# Altium PCB bmb_extender.PcbDoc
Units mil, origin at the board's own origin, x right, y up, seen from the top; angles counter-clockwise.
Board outline 2450 x 12000 mil, 2 copper layers (Top Layer, Bottom Layer); 2 components, 10 nets, 36 pads, 4 vias.
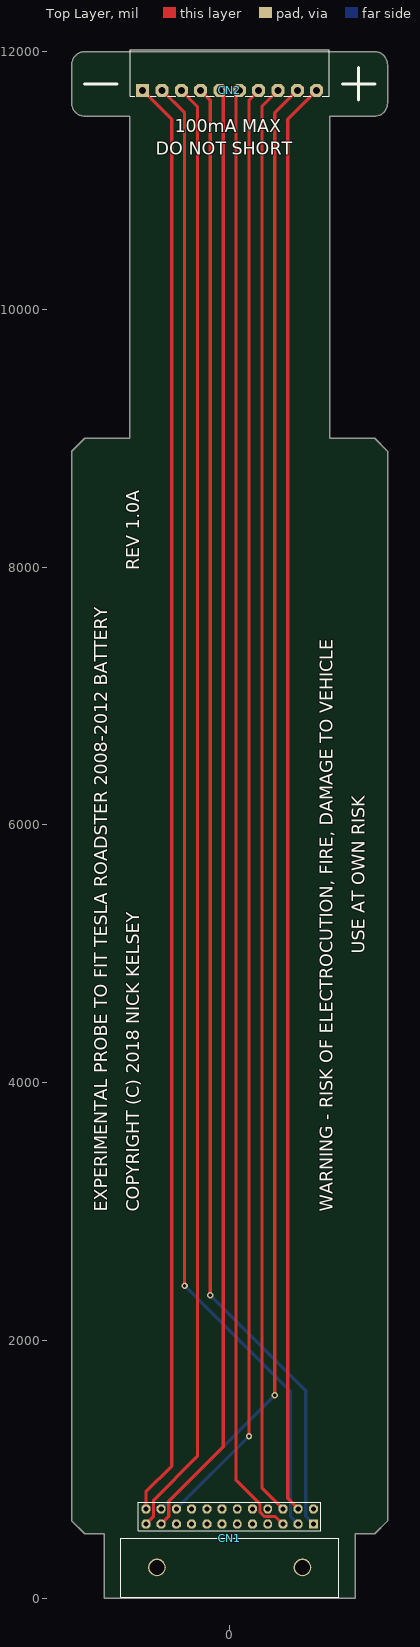
[diagram p0: Top Layer view]
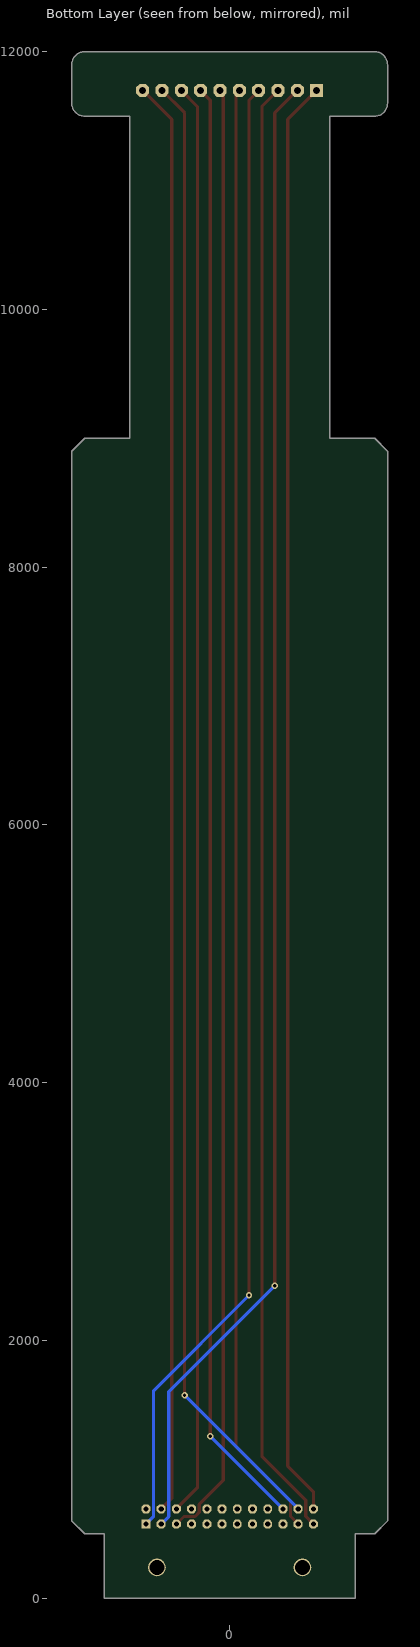
[diagram p1: Bottom Layer view, seen from below]

## Layer stack, top to bottom
Top Solder: solder mask 0.4, Solder Resist, Dk 3.5
Top Layer: signal copper 1.4
Dielectric 1: dielectric 12.6, FR-4, Dk 4.8
Bottom Layer: signal copper 1.4
Bottom Solder: solder mask 0.4, Solder Resist, Dk 3.5

## Board outline
-1225,600 -1125,500 -975,500 -975,0 975,0 975,500 1125,500 1225,600 1225,8900 1125,9000 775,9000 775,11500 1125,11500 ccw(c1125,11600) 1225,11600 1225,11900 ccw(c1125,11900) 1125,12000 -1125,12000 ccw(c-1125,11900) -1225,11900 -1225,11600 ccw(c-1125,11600) -1125,11500 -775,11500 -775,9000 -1125,9000 -1225,8900

## Design rules (kind name [scope] priority, off if disabled: settings)
Clearance [All] p1: gap=10 ignorepadtopadclearanceinfootprint=FALSE except(0: Arc-Hole Track-Hole SMDPad-Hole THPad-Hole Via-Hole Fill-Hole Poly-Hole Region-Hole Text-Hole)
HoleSize [All] p1: absolutevalues=TRUE maxlimit=500 minlimit=1 maxpercent=80.000 minpercent=20.000
PolygonConnect [All] p1: connectstyle=Relief reliefconductorwidth=10 reliefentries=4 polygonreliefangle="90 Angle" airgapwidth=10
RoutingVias [All] p1: holewidth=28 width=50 viastyle="Through Hole" minholewidth=28 minwidth=50 maxholewidth=28 maxwidth=50
SilkToSilkClearance [All] p1 off: silktosilkclearance=10
SilkToSolderMaskClearance [IsPad] p1: minsilkscreentomaskgap=0 clearancetoexposedcopper=TRUE
SolderMaskExpansion [All] p1: expansion=4
Width [All] p1: maxlimit=100 minlimit=5 preferedwidth=10
27 further rules are at their usual default settings.

## Components (designator, comment, footprint, x,y, rotation, side; value= is the part's Value field where it differs from the comment)
CN1 "0444282401" MOLEX_0444282401 0,575 r180 top
CN2 "20020110-D101A01LF" 20020110-D101A01LF 0,11700 r0 top

## Footprints (in the part's own frame and the unit in brackets; to place one, negate y for a bottom-side part, rotate by r counter-clockwise, add the part's x,y. Pads: shape width x height; smd on the part's side, far side on the other; paste and mask are expansions set on the pad)
20020110-D101A01LF [mm]
  rect 2.54x2.54 hole 1.4: 1(-17.145,0)
  oct 2.54x2.54 hole 1.4: 2(-13.335,0) 3(-9.525,0) 4(-5.715,0) 5(-1.905,0) 6(1.905,0) 7(5.715,0) 8(9.525,0) 9(13.335,0) 10(17.145,0)
  silkscreen extent -19.63,-1.2 19.63,8
MOLEX_0444282401 [mm]
  round 3.5 hole 3: 0(-14.34,8.53) 0(14.34,8.53)
  rect 1.75x1.75 hole 1.02: 1(-16.5,0)
  oct 1.75x1.75 hole 1.02: 2(-13.5,0) 3(-10.5,0) 4(-7.5,0) 5(-4.5,0) 6(-1.5,0) 7(1.5,0) 8(4.5,0) 9(7.5,0) 10(10.5,0) 11(13.5,0) 12(16.5,0) 13(-16.5,-3) 14(-13.5,-3) 15(-10.5,-3) 16(-7.5,-3) 17(-4.5,-3) 18(-1.5,-3) 19(1.5,-3) 20(4.5,-3) 21(7.5,-3) 22(10.5,-3) 23(13.5,-3) 24(16.5,-3)
  silkscreen extent -21.5,-4.3 21.5,14.43

## Part data
CN2: library part SIL10

## Via types
v1: diameter 50, hole 25, Top Layer to Bottom Layer, tented both sides, 4 vias

## Nets (pads, with @x,y where several pads share a name; then routed paths per layer and width w, separated by ;. In a path a pad name is that pad's centre, name@x,y a point inside that pad or via, vN(x,y) a via of type N, cw(c..) or ccw(c..) an arc to the next point about the centre after c; other vN are vias at no path point)
V0: CN1.24 CN2.1 | length 11182.8
  Top Layer w25: CN2.1 -450,11475 -450,1025 -649.61,825.39 CN1.24
V1: CN1.2 CN2.2 | length 11562.6
  Top Layer w25: CN2.2 -350,11525 v1(-350,2425)
  Bottom Layer w25: v1(-350,2425) 473,1602 473,633.5 CN1.2
V2: CN1.12 CN2.3 | length 11342.3
  Top Layer w25: CN1.12 -590,634.61 -590,760 -250,1100 -250,11575 CN2.3
V3: CN1.1 CN2.4 | length 11487.3
  Top Layer w25: CN2.4 -150,11625 v1(-150,2350)
  Bottom Layer w25: v1(-150,2350) 590,1610 590,634.61 CN1.1
V4: CN1.11 CN2.5 | length 11334.8
  Top Layer w25: CN1.11 -472,634.5 -472,752.61 -50,1174.61 -50,11675 CN2.5
V5: CN1.3 CN2.6 | length 11336.5
  Top Layer w25: CN2.6 50,11675 50,914 236,728 236,666 268,634 354.39,634 CN1.3
V6: CN1.22 CN2.7 | length 11271.3
  Top Layer w25: v1(150,1256.5) 150,11625 CN2.7
  Bottom Layer w25: CN1.22 v1(150,1256.5)
V7: CN1.15 CN2.8 | length 11126.3
  Top Layer w25: CN2.8 250,11575 250,856.5 CN1.15
V8: CN1.23 CN2.9 | length 11444.9
  Top Layer w25: v1(350.2,1574.8) 350.2,11525 ; 350.2,11524.8 350,11525 CN2.9
  Bottom Layer w25: CN1.23 v1(350.2,1574.8)
V9: CN1.14 CN2.10 | length 11133.8
  Top Layer w25: CN1.14 450,774.61 450,11475 CN2.10
pads on no net: CN1.0 CN1.4 CN1.5 CN1.6 CN1.7 CN1.8 CN1.9 CN1.10 CN1.13 CN1.16 CN1.17 CN1.18 CN1.19 CN1.20 CN1.21

## Silkscreen, mask and mechanical layers (free items; w line width, h text height)
Top Overlay:
  lines w25: -1125,11750 -875,11750 ; 875,11750 1125,11750 ; 1000,11625 1000,11875
  text "100mA MAX" at -425,11375 h100
  text "DO NOT SHORT" at -575,11200 h100
  text "REV 1.0A" at -700,7975 h100 r90
  text "USE AT OWN RISK" at 1050,5000 h100 r90
  text "EXPERIMENTAL PROBE TO FIT TESLA ROADSTER 2008-2012 BATTERY" at -950,3000 h100 r90
  text "COPYRIGHT (C) 2018 NICK KELSEY" at -700,3000 h100 r90
  text "WARNING - RISK OF ELECTROCUTION, FIRE, DAMAGE TO VEHICLE" at 800,3000 h100 r90
Mechanical 1:
  the board outline again, w6